# Altium PCB sdram_xs.PcbDoc
Units mm, origin at the board's own origin, x right, y up, seen from the top; angles counter-clockwise.
Board outline 22.86 x 50.8 mm, 2 copper layers (Top Layer, Bottom Layer), stack 1.671 mm thick; 9 components, 38 nets, 108 pads, 34 vias.
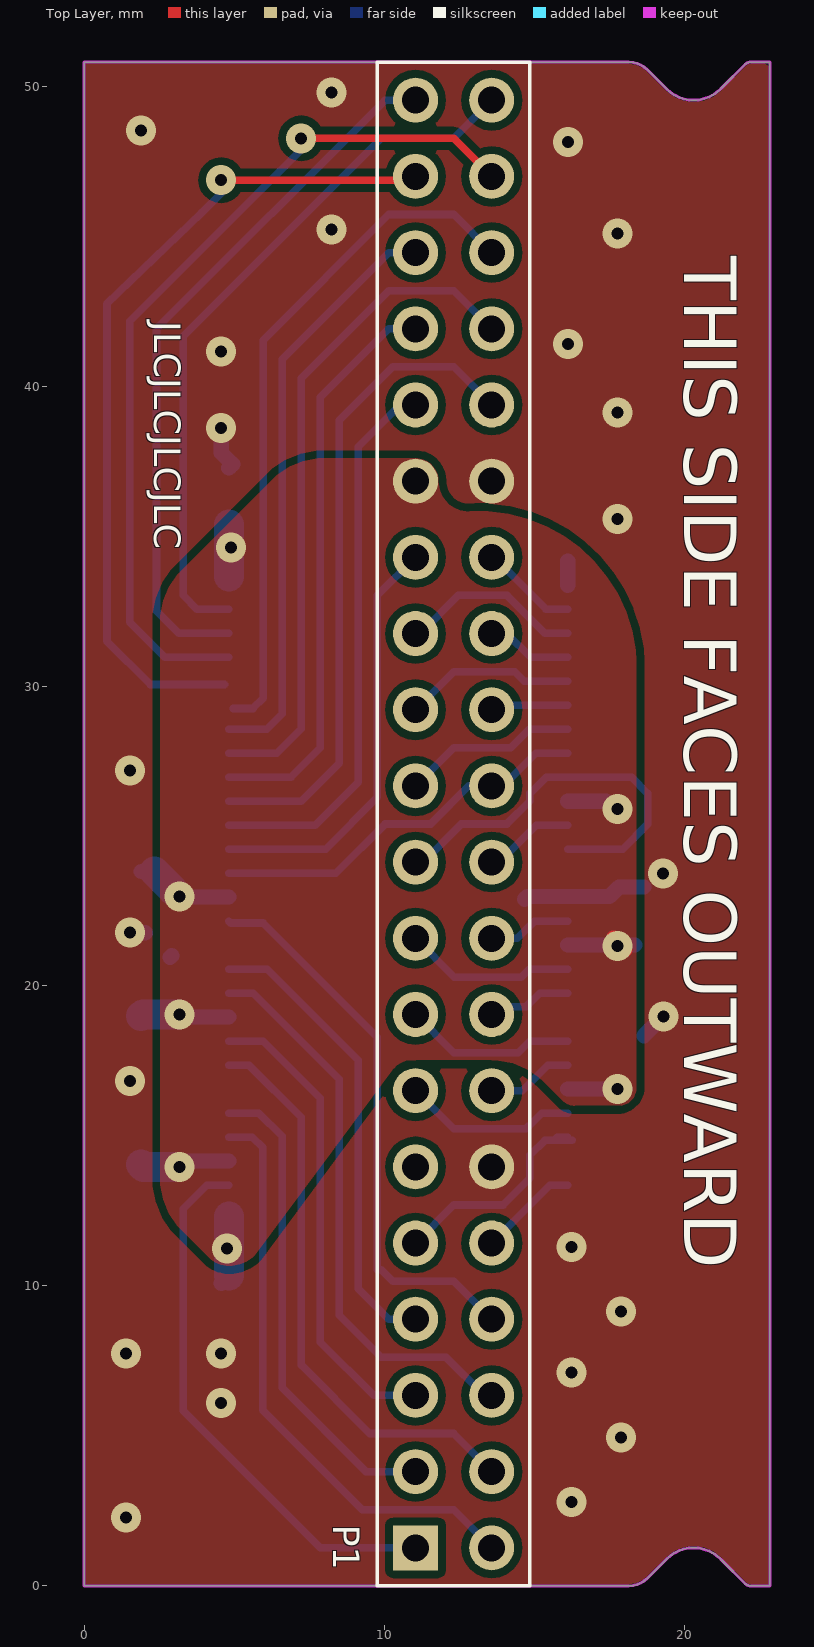
[diagram p0: Top Layer view]
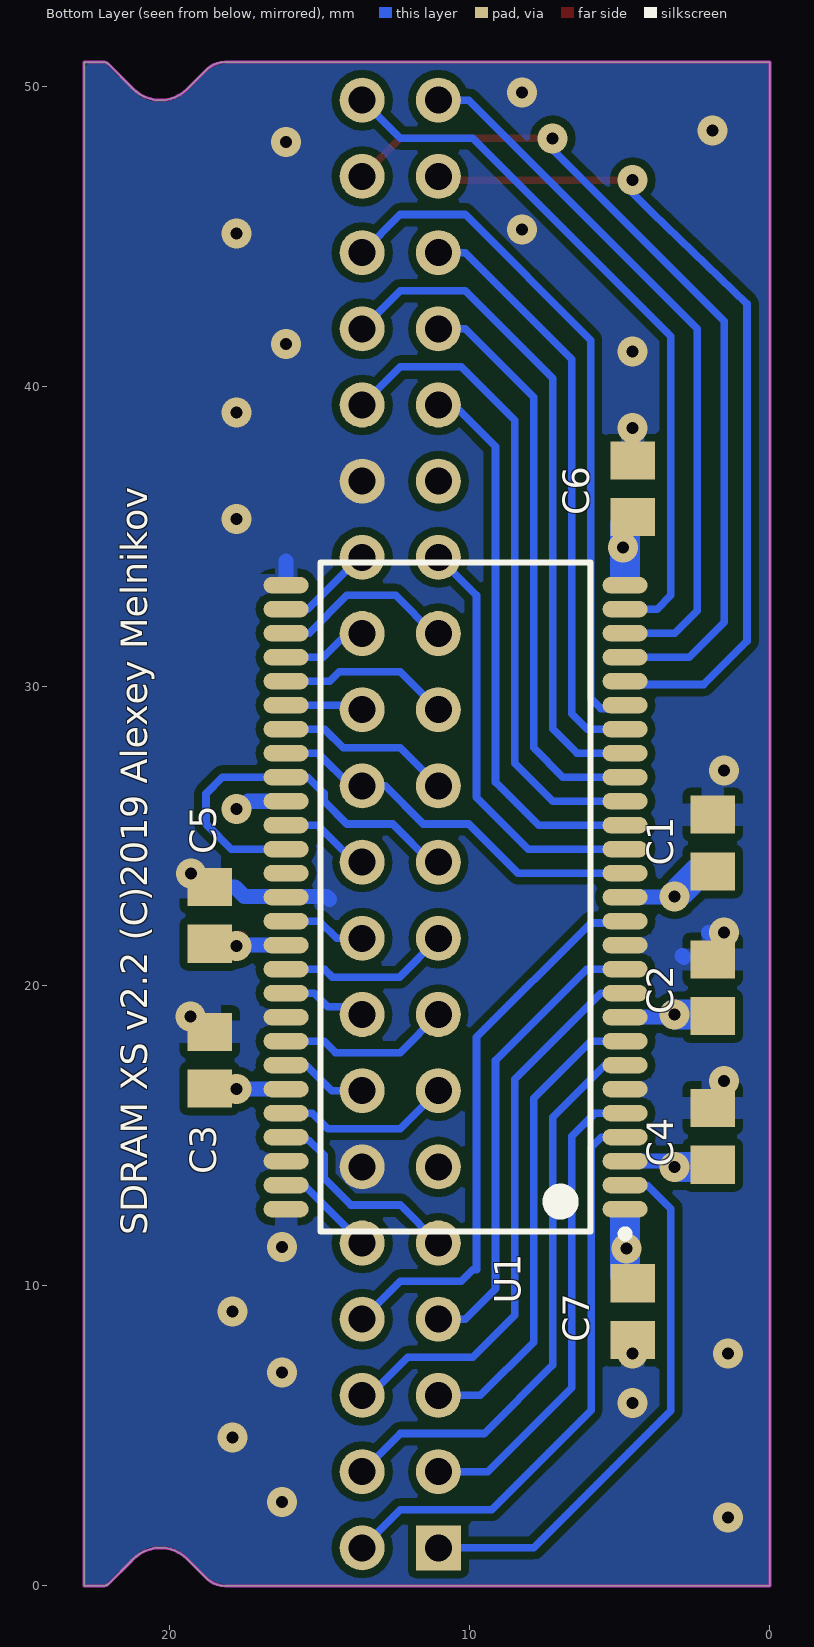
[diagram p1: Bottom Layer view, seen from below]
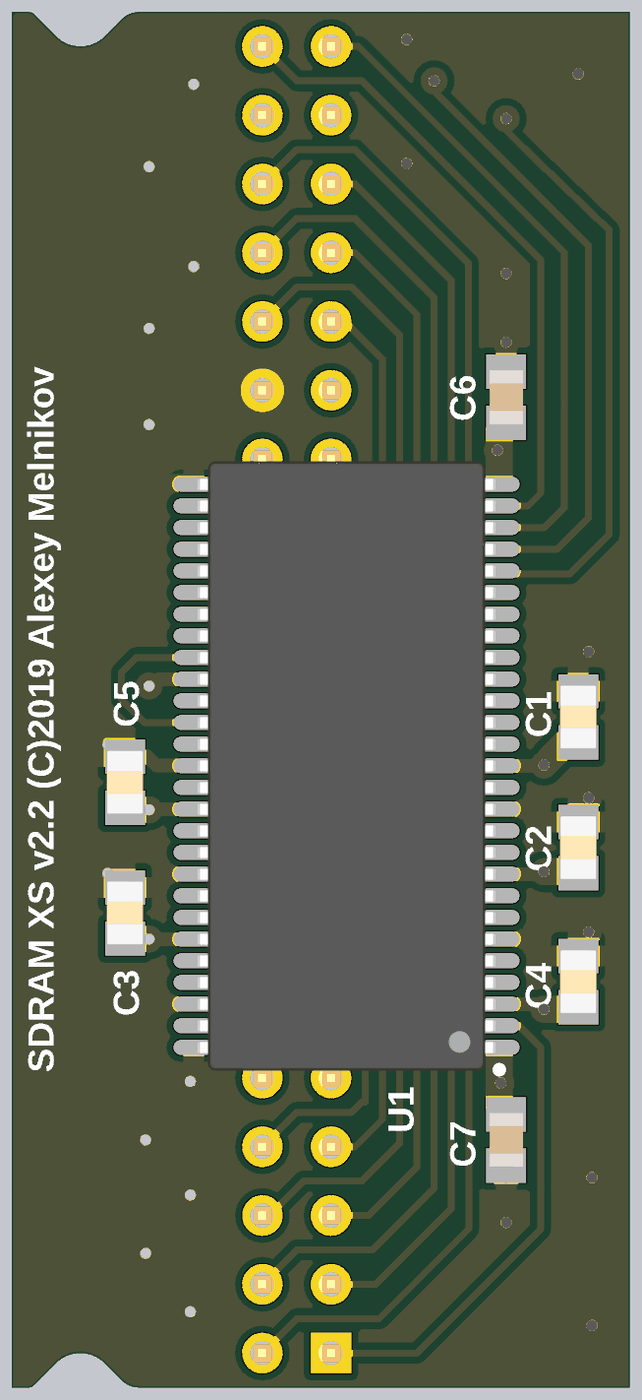
[diagram p2: 3D render of the assembled board from below, using the file's embedded part models]

## Layer stack, top to bottom
Top Solder: solder mask 0.0102, Solder Resist, Dk 3.5
Top Layer: signal copper 0.0356
Dielectric 1: dielectric 1.6, FR-4, Dk 4.8
Bottom Layer: signal copper 0.0356
Bottom Solder: solder mask 0.0102, Solder Resist, Dk 3.5

## Board outline
19.422,0.898 18.781,0.257 cw(c18.161,0.876) 18.161,0 17.145,0 0,0 0,50.8 9.271,50.8 17.145,50.8 18.161,50.8 cw(c18.161,49.924) 18.781,50.543 19.422,49.902 ccw(c20.32,50.8) 20.32,49.53 ccw(c20.32,50.8) 21.276,49.964 22.032,50.72 cw(c22.225,50.527) 22.225,50.8 22.86,50.8 22.86,0 22.225,0 cw(c22.225,0.273) 22.032,0.08 21.276,0.836 ccw(c20.32,0) 20.32,1.27 ccw(c20.32,0)

## Design rules (kind name [scope] priority, off if disabled: settings)
BoardOutlineClearance [All] p1: gap=0 ignorepadtopadclearanceinfootprint=FALSE
Clearance keep-out_clearance [InNamedPolygon('ground') vs OnLayer('Keep-Out Layer')] p1: gap=0 ignorepadtopadclearanceinfootprint=FALSE
Clearance keep-out_clearance_1 [IsBoardCutoutRegion vs InNamedPolygon('ground')] p2: gap=0 ignorepadtopadclearanceinfootprint=FALSE
Clearance [All] p3: gap=0.254 ignorepadtopadclearanceinfootprint=TRUE except(0: Arc-Hole Track-Hole SMDPad-Hole THPad-Hole Via-Hole Fill-Hole Poly-Hole Region-Hole Text-Hole)
ComponentClearance [All] p1 off: gap=0.254 collisioncheckmode=3 verticalgap=0.254 showdistances=FALSE
Height [All] p1 off: minheight=0 maxheight=25.4 prefheight=12.7
HoleSize [All] p1: absolutevalues=TRUE maxlimit=6 minlimit=0.025 maxpercent=80.000 minpercent=20.000
MinimumSolderMaskSliver [All] p1: minsoldermaskwidth=0.25
PolygonConnect PolygonConnect_1 [HasFootprint('C0805')] p1: connectstyle=Relief reliefconductorwidth=0.762 reliefentries=4 polygonreliefangle="90 Angle" airgapwidth=0.254
PolygonConnect PolygonConnect_2 [HasFootprint('TSOP54')] p2: connectstyle=Relief reliefconductorwidth=0.762 reliefentries=4 polygonreliefangle="90 Angle" airgapwidth=0.254
PolygonConnect [All] p3: connectstyle=Direct reliefconductorwidth=0.254 reliefentries=4 polygonreliefangle="90 Angle" airgapwidth=0.254
RoutingVias [All] p1: holewidth=0.4 width=1 viastyle="Through Hole" minholewidth=0.4 minwidth=1 maxholewidth=0.4 maxwidth=1
ShortCircuit [IsBoardCutoutRegion] p1: allowed=TRUE
ShortCircuit ShortCircuit_1 [All] p2: allowed=FALSE
SilkToSolderMaskClearance [IsPad] p1 off: minsilkscreentomaskgap=0.127 clearancetoexposedcopper=TRUE
SolderMaskExpansion SolderMaskExpansion_U1 [InComponent('U1')] p1: expansion=0
SolderMaskExpansion [All] p2: expansion=0.051
Width Width_power [InNetClass('power')] p1: maxlimit=2 minlimit=0.254 preferedwidth=0.508 minimp=50.000000 maximp=50.000000 favimp=50.000000
Width Width_signal [All] p2: maxlimit=0.254 minlimit=0.254 preferedwidth=0.254
24 further rules are at their usual default settings.

## Classes and differential pairs
net class power: GND VCC

## Components (designator, comment, footprint, x,y, rotation, side; value= is the part's Value field where it differs from the comment)
C1 "C0805" C0805 1.905,24.765 r270 bottom value=0.1uF
C2 "C0805" C0805 1.905,19.939 r270 bottom value=0.1uF
C3 "+" C0805 18.669,17.526 r270 bottom value=0.1uF
C4 "C0805" C0805 1.905,14.986 r270 bottom value=0.1uF
C5 "+" C0805 18.669,22.352 r270 bottom value=0.1uF
C6 "+" C0805 4.572,36.576 r270 bottom value=0.1uF
C7 "+" C0805 4.572,9.144 r90 bottom value=0.1uF
P1 "Header 20X2" HDR20x2_90 11.049,1.27 r270 top locked
U1 "" TSOP54 10.476,22.962 r0 bottom

## Footprints (in the part's own frame and the unit in brackets; to place one, negate y for a bottom-side part, rotate by r counter-clockwise, add the part's x,y. Pads: shape width x height; smd on the part's side, far side on the other; paste and mask are expansions set on the pad)
C0805 [mm] "Capacitor, Chip; 2.35 mm L X 1.35 mm W X 1.00 mm H body"
  rect 1.27x1.48 smd: 1(-0.945,0) 2(0.945,0)
  body extent -1.17,-0.67 1.17,0.67, height 1
HDR20x2_90 [mm] "Header, Right Angle Receptacle, 2.54 mm pitch; 0.65 mm lead width, 40 pins, 2 rows, 20 pins per row, 50.80 mm L X 8.50 mm W X 5.08 mm H body"
  rect 1.5x1.5 hole 0.9: 1(0,0)
  round 1.5 hole 0.9: 2(0,2.54) 3(-2.54,0) 4(-2.54,2.54) 5(-5.08,0) 6(-5.08,2.54) 7(-7.62,0) 8(-7.62,2.54) 9(-10.16,0) 10(-10.16,2.54) 11(-12.7,0) 12(-12.7,2.54) 13(-15.24,0) 14(-15.24,2.54) 15(-17.78,0) 16(-17.78,2.54) 17(-20.32,0) 18(-20.32,2.54) 19(-22.86,0) 20(-22.86,2.54) 21(-25.4,0) 22(-25.4,2.54) 23(-27.94,0) 24(-27.94,2.54) 25(-30.48,0) 26(-30.48,2.54) 27(-33.02,0) 28(-33.02,2.54) 29(-35.56,0) 30(-35.56,2.54) 31(-38.1,0) 32(-38.1,2.54) 33(-40.64,0) 34(-40.64,2.54) 35(-43.18,0) 36(-43.18,2.54) 37(-45.72,0) 38(-45.72,2.54) 39(-48.26,0) 40(-48.26,2.54)
  silkscreen extent -49.53,-1.27 1.27,3.81, body extent -49.53,-10.39 1.27,2.87, height 5.08
TSOP54 [mm] "SOP, 54-Leads, Body 22.3x10.2mm, Pitch 0.8mm, IPC Medium Density"
  oval 1.5x0.55 smd: 1(-5.65,10.4) 2(-5.65,9.6) 3(-5.65,8.8) 4(-5.65,8) 5(-5.65,7.2) 6(-5.65,6.4) 7(-5.65,5.6) 8(-5.65,4.8) 9(-5.65,4) 10(-5.65,3.2) 11(-5.65,2.4) 12(-5.65,1.6) 13(-5.65,0.8) 14(-5.65,0) 15(-5.65,-0.8) 16(-5.65,-1.6) 17(-5.65,-2.4) 18(-5.65,-3.2) 19(-5.65,-4) 20(-5.65,-4.8) 21(-5.65,-5.6) 22(-5.65,-6.4) 23(-5.65,-7.2) 24(-5.65,-8) 25(-5.65,-8.8) 26(-5.65,-9.6) 27(-5.65,-10.4) 28(5.65,-10.4) 29(5.65,-9.6) 30(5.65,-8.8) 31(5.65,-8) 32(5.65,-7.2) 33(5.65,-6.4) 34(5.65,-5.6) 35(5.65,-4.8) 36(5.65,-4) 37(5.65,-3.2) 38(5.65,-2.4) 39(5.65,-1.6) 40(5.65,-0.8) 41(5.65,0) 42(5.65,0.8) 43(5.65,1.6) 44(5.65,2.4) 45(5.65,3.2) 46(5.65,4) 47(5.65,4.8) 48(5.65,5.6) 49(5.65,6.4) 50(5.65,7.2) 51(5.65,8) 52(5.65,8.8) 53(5.65,9.6) 54(5.65,10.4)
  silkscreen extent -5.77,-11.15 4.5,11.35, body extent -5.88,-11.25 5.88,11.27, height 1

## Part data
C1 C2 C4: "Ceramic Chip Capacitor - Standard", PackageDocument=Mar-2001, Code_IPC=2012[0805], Code_JEITA=0805, ComponentLink1Description="Manufacturer Link", ComponentLink1URL=http://www.kemet.com/, ComponentLink2Description=Datasheet, ComponentLink2URL=http://www.kemet.com/kemet/web/homepage/kechome.nsf/vapubfilesname/F3102TA.pdf/$file/F3102TA.pdf, DatasheetDocument=Mar-2001, LatestRevisionDate=19-Mar-2004, LatestRevisionNote="Silkscreen size reduced.", Note="Footprint corresponds to dimensions for bulk cassette packaging. This case size has tightened tolerances.", PackageReference=0805, Published=17-Jul-2002, Publisher="Altium Limited"
C3 C5 C6 C7: library part C0805, "Ceramic Chip Capacitor - Standard", PackageDocument=Mar-2001, Code_IPC=2012[0805], Code_JEITA=0805, ComponentLink1Description="Manufacturer Link", ComponentLink1URL=http://www.kemet.com/, ComponentLink2Description=Datasheet, ComponentLink2URL=http://www.kemet.com/kemet/web/homepage/kechome.nsf/vapubfilesname/F3102TA.pdf/$file/F3102TA.pdf, DatasheetDocument=Mar-2001, LatestRevisionDate=19-Mar-2004, LatestRevisionNote="Silkscreen size reduced.", Note="Footprint corresponds to dimensions for bulk cassette packaging. This case size has tightened tolerances.", PackageReference=0805, Published=17-Jul-2002, Publisher="Altium Limited"
P1: "Header, 20-Pin, Dual row", LatestRevisionDate=17-Jul-2002, LatestRevisionNote="Re-released for DXP Platform.", Publisher="Altium Limited"
U1: library part AS4C16M16SA-6TCN, "256Mb SDR SDRAM, 16Mb x 16, 6ns, 3.3V, 54-Pin TSOP", Manufacturer=Micron, Op. Temp.="0C to +70C", PartNumber=MT48LC16M16A2P-6A, Voltage=3.3V, CL="CL = 3", Clock Rate="167 MHz", ComponentLink1Description="Manufacturer URL", ComponentLink1URL=http://www.micron.com/, ComponentLink2Description=Datasheet, ComponentLink2URL=http://www.micron.com/~/media/Documents/Products/Data%20Sheet/DRAM/256Mb_sdr.pdf, ComponentLink3Description="Package Specification", ComponentLink3URL=http://www.micron.com/~/media/Documents/Products/Data%20Sheet/DRAM/128mb_x4x8x16_sdram.pdf, Cycle Time=6ns, Data Rate=PC133, DatasheetVersion=Rev.Q, Density=256Mb, Depth=16Mb, Mounting Technology="Surface Mount", PackageDescription="54-Pin Thin Small Outline Package, 10.16 x 22.22 mm, Pitch 0.8 mm", PackageReference=MICT-P-54, PackageVersion=Rev.Q, RoHS=Yes, Width=x16

## Via types
v1: diameter 1, hole 0.4, Top Layer to Bottom Layer, tented both sides, 34 vias

## Nets (pads, with @x,y where several pads share a name; then routed paths per layer and width w, separated by ;. In a path a pad name is that pad's centre, name@x,y a point inside that pad or via, vN(x,y) a via of type N, cw(c..) or ccw(c..) an arc to the next point about the centre after c; other vN are vias at no path point)
A0: P1.37 U1.23 | length 28
  Top Layer w0.254: v1(4.572,46.863) P1.37@11.049,46.863
  Bottom Layer w0.254: v1(4.572,46.863) 4.572,46.434 3.916,45.778 0.762,42.745 0.762,31.496 2.206,30.052 U1.23@4.682,30.052
A1: P1.38 U1.24 | length 29.2
  Top Layer w0.254: v1(7.239,48.26) 12.319,48.26 P1.38
  Bottom Layer w0.254: U1.24 2.693,30.962 1.524,32.131 1.524,42.164 7.239,47.879 v1(7.239,48.26)
A2: P1.39 U1.25 | length 23.9
  Bottom Layer w0.254: U1.25 3.163,31.762 2.413,32.512 2.413,41.91 10.033,49.53 P1.39
A3: P1.40 U1.26 | length 23.9
  Bottom Layer w0.254: U1.26 3.76,32.562 3.302,33.02 3.302,41.656 9.906,48.26 12.319,48.26 P1.40
A4: P1.28 U1.29 | length 3.3
  Bottom Layer w0.254: P1.28 13.672,34.29 15.4,32.562 U1.29
A5: P1.25 U1.30 | length 6.1
  Bottom Layer w0.254: P1.25 11.2,31.75 12.47,33.02 14.097,33.02 15.355,31.762 U1.30
A6: P1.26 U1.31 | length 2.9
  Bottom Layer w0.254: P1.26 14.097,31.75 14.885,30.962 U1.31
A7: P1.23 U1.32 | length 5.7
  Bottom Layer w0.254: P1.23 12.319,30.48 14.351,30.48 14.669,30.162 U1.32
A8: P1.24 U1.33 | length 2.8
  Bottom Layer w0.254: P1.24@13.705,29.094 P1.24 13.741,29.362 U1.33
A9: P1.21 U1.34 | length 5.9
  Bottom Layer w0.254: P1.21 12.319,27.94 14.224,27.94 14.846,28.562 U1.34
A10: P1.36 U1.22 | length 23
  Bottom Layer w0.254: U1.22@4.97,29.252 5.63,29.252 5.969,29.591 5.969,41.529 10.16,45.72 12.319,45.72 P1.36
A11: P1.22 U1.15 U1.35 | length 13
  Bottom Layer w0.254: U1.15 8.395,23.762 10.033,25.4 11.557,25.4 12.827,26.67 P1.22 13.97,26.67 15.062,27.762 U1.35
A12: P1.19 U1.36 U1.39 | length 13.3
  Bottom Layer w0.254: P1.19 11.303,24.13 12.573,25.4 14.097,25.4 14.859,26.162 14.859,26.416 15.405,26.962 U1.36 18.25,26.962 18.796,26.416 18.796,25.4 17.958,24.562 U1.39
BA0: P1.34 U1.20 | length 22.5
  Bottom Layer w0.254: U1.20 6.426,27.762 7.239,28.575 7.239,40.259 10.16,43.18 12.319,43.18 P1.34
BA1: P1.35 U1.21 | length 19.7
  Bottom Layer w0.254: U1.21 6.083,28.562 6.604,29.083 6.604,40.894 10.16,44.45 P1.35
CAS: P1.31 U1.17 | length 18.6
  Bottom Layer w0.254: U1.17 7.709,25.362 9.144,26.797 9.144,37.973 10.541,39.37 P1.31
CLK: P1.20 U1.38 | length 3
  Bottom Layer w0.254: P1.20 13.843,24.13 15.075,25.362 U1.38
CS: P1.33 U1.19 | length 19.3
  Bottom Layer w0.254: U1.19 6.896,26.962 7.874,27.94 7.874,39.624 10.16,41.91 P1.33
DQ0: P1.1 U1.2 | length 18.2
  Bottom Layer w0.254: U1.2 4.091,13.362 3.302,12.573 3.302,5.842 7.874,1.27 P1.1
DQ1: P1.2 U1.4 | length 19.6
  Bottom Layer w0.254: U1.4 5.612,14.962 5.957,14.617 5.957,5.854 9.271,2.54 12.319,2.54 P1.2
DQ2: P1.3 U1.5 | length 16.1
  Bottom Layer w0.254: U1.5 5.828,15.762 6.604,14.986 6.604,6.604 9.398,3.81 P1.3
DQ3: P1.4 U1.7 | length 19.2
  Bottom Layer w0.254: U1.7 5.498,17.362 7.239,15.621 7.239,7.366 9.525,5.08 12.319,5.08 P1.4
DQ4: P1.5 U1.8 | length 15.9
  Bottom Layer w0.254: U1.8 5.968,18.162 7.874,16.256 7.874,8.128 9.652,6.35 P1.5
DQ5: P1.6 U1.10 | length 18.9
  Bottom Layer w0.254: U1.10 5.638,19.762 8.509,16.891 8.509,9.017 9.906,7.62 12.065,7.62 13.335,6.35 P1.6
DQ6: P1.7 U1.11 | length 15.5
  Bottom Layer w0.254: U1.11 6.108,20.562 9.144,17.526 9.144,9.906 10.16,8.89 P1.7
DQ7: P1.8 U1.13 | length 18.8
  Bottom Layer w0.254: U1.13 4.89,22.098 5.969,22.098 9.779,18.288 9.779,10.541 9.906,10.541 10.287,10.16 12.319,10.16 P1.8
DQ8: P1.18 U1.42 | length 2.8
  Bottom Layer w0.254: P1.18 14.443,21.59 15.015,22.162 U1.42
DQ9: P1.17 U1.44 | length 5.7
  Bottom Layer w0.254: P1.17 12.345,20.294 14.579,20.294 14.847,20.562 U1.44
DQ10: P1.16 U1.45 | length 2.8
  Bottom Layer w0.254: P1.16 13.843,19.304 14.732,19.304 15.19,19.762 U1.45
DQ11: P1.15 U1.47 | length 5.8
  Bottom Layer w0.254: P1.15 12.319,17.78 14.478,17.78 14.86,18.162 U1.47
DQ12: P1.14 U1.48 | length 2.9
  Bottom Layer w0.254: P1.14 14.605,16.51 15.457,17.362 U1.48
DQ13: P1.13 U1.50 | length 5.8
  Bottom Layer w0.254: P1.13 12.319,15.24 14.732,15.24 14.986,15.494 15.254,15.762 U1.50
DQ14: P1.9 U1.51 | length 7.6
  Bottom Layer w0.254: P1.9 12.319,12.7 13.97,12.7 14.859,13.589 14.859,14.351 15.367,14.859 U1.51@15.674,14.859 ; U1.51 15.777,14.962 U1.51@15.674,14.859 ; U1.51@16.277,14.859 U1.51@15.674,14.859
DQ15: P1.10 U1.53 | length 3.3
  Bottom Layer w0.254: P1.10 15.521,13.362 U1.53
GND: C1.1 C2.1 C3.1 C4.1 C5.1 C6.1 C7.1 P1.12 P1.30 U1.6 U1.12 U1.28 U1.41 U1.46 U1.52 U1.54 | length 8
  Bottom Layer w0.508: v1(1.524,21.778) 2.042,21.778 ; 2.865,20.955 2.921,21.011 ; v1(4.572,38.608) 4.572,37.775 4.953,37.394 C6.1@4.826,37.267 ; 14.682,22.894 14.775,22.987 15.319,22.987 15.327,22.979 17.518,22.979 17.836,23.297 C5.1 ; U1.28 16.126,34.166 ; C3.1@18.669,18.344 v1(19.309,18.984)
  other v1: 1.397,2.286 16.256,2.794 17.907,4.953 4.572,6.096 16.256,7.112 1.397,7.747 4.572,7.747 17.907,9.144 16.256,11.303 1.524,16.825 19.304,23.749 1.524,27.178 17.78,35.56 17.78,39.116 4.572,41.148 16.129,41.402 17.78,45.085 8.255,45.212 16.129,48.133 1.905,48.514 8.255,49.784
RAS: P1.32 U1.18 | length 22
  Bottom Layer w0.254: U1.18 7.239,26.162 8.509,27.432 8.509,38.862 10.287,40.64 12.319,40.64 P1.32
VCC: C1.2 C2.2 C3.2 C4.2 C5.2 C6.2 C7.2 P1.29 U1.1 U1.3 U1.9 U1.14 U1.27 U1.37 U1.43 U1.49 | length 20.1
  Top Layer w0.508: v1@17.653,21.59 v1@18.034,21.209
  Bottom Layer w0.508: C1.2 C1.2@2.342,23.82 ; v1@2.971,23.191 v1@2.971,22.987 ; v1(3.175,19.05) 3.263,18.962 U1.9 ; v1(3.175,22.987) v1@2.971,22.987 ; v1@3.296,14.162 U1.3 ; C7.2 C7.2@4.826,10.343 ; U1.14 2.946,22.962 v1@2.971,22.987 ; U1.49 v1(17.78,16.562) C3.2@18.034,16.562 ; U1.43 C5.2@18.37,21.362 ; U1.37 17.399,26.162 17.78,25.781 v1@17.907,25.781
  Bottom Layer w1: C4.2 1.976,13.97 v1@3.104,13.97 ; C2.2 1.961,19.05 v1(3.175,19.05) ; C1.2@2.342,23.82 v1@2.971,23.191 ; C7.2@4.826,10.343 U1.1@4.826,12.319 ; 4.826,33.655 C6.2@4.826,35.377
  other v1: 4.77,11.247 3.175,13.97 17.78,21.336 17.78,25.908 4.897,34.615
WE: P1.27 U1.16 | length 14.2
  Bottom Layer w0.254: U1.16 8.052,24.562 9.779,26.289 9.779,33.02 P1.27
pads on no net: P1.11 U1.40

## Polygon pours and split planes (outlines as drawn)
VCC on Top Layer "power" (solid, remove dead copper, pour order 19): 18.415,16.637 cw(c17.78,16.637) 17.78,16.002 16.383,16.002 cw(c16.35,16.535) 16.35,16.001 cw(c16.35,16.535) 15.996,16.135 15.329,16.802 ccw(c13.589,15.063) 13.589,17.523 10.81,17.523 ccw(c10.978,16.643) 10.254,17.171 8.255,14.478 5.693,11.027 cw(c4.826,11.894) 4.826,10.668 cw(c4.826,11.588) 4.176,10.937 3.284,11.829 cw(c5.08,13.625) 2.54,13.625 2.54,14.097 2.54,30.48 2.54,32.095 cw(c5.079,32.095) 3.284,33.891 6.241,36.848 cw(c8.037,35.053) 8.037,37.592 11.049,37.592 cw(c11.049,36.83) 11.811,36.83 ccw(c12.824,36.83) 12.824,35.817 cw(c13.138,30.642) 13.141,35.827 cw(c13.141,30.544) 18.415,30.861
GND on Top Layer "ground" (solid, remove dead copper, pour order 26): 0,50.8 22.86,50.8 22.86,0 0,0
GND on Bottom Layer "ground" (solid, remove dead copper, pour order 24): 0,50.8 22.86,50.8 22.86,0 0,0

## Keep-outs
Keep-Out Layer:
  the board outline again, w0.1

## Silkscreen, mask and mechanical layers (free items; w line width, h text height)
Top Overlay:
  text "THIS SIDE FACES OUTWARD" at 19.431,44.323 h3 r270
  text "JLCJLCJLCJLC" at 2.032,42.164 h1.52 r270
Bottom Overlay:
  text "SDRAM XS v2.2 (C)2019 Alexey Melnikov" at 20.447,11.684 h1.52 r270